# Altium PCB Video.PcbDoc
Units mm, origin at the board's own origin, x right, y up, seen from the top; angles counter-clockwise.
Board outline 44.13 x 23.11 mm, 2 copper layers (Top Layer, Bottom Layer); 36 components, 24 nets, 82 pads, 0 vias.
Unrouted connection lines stored in the file: 51.
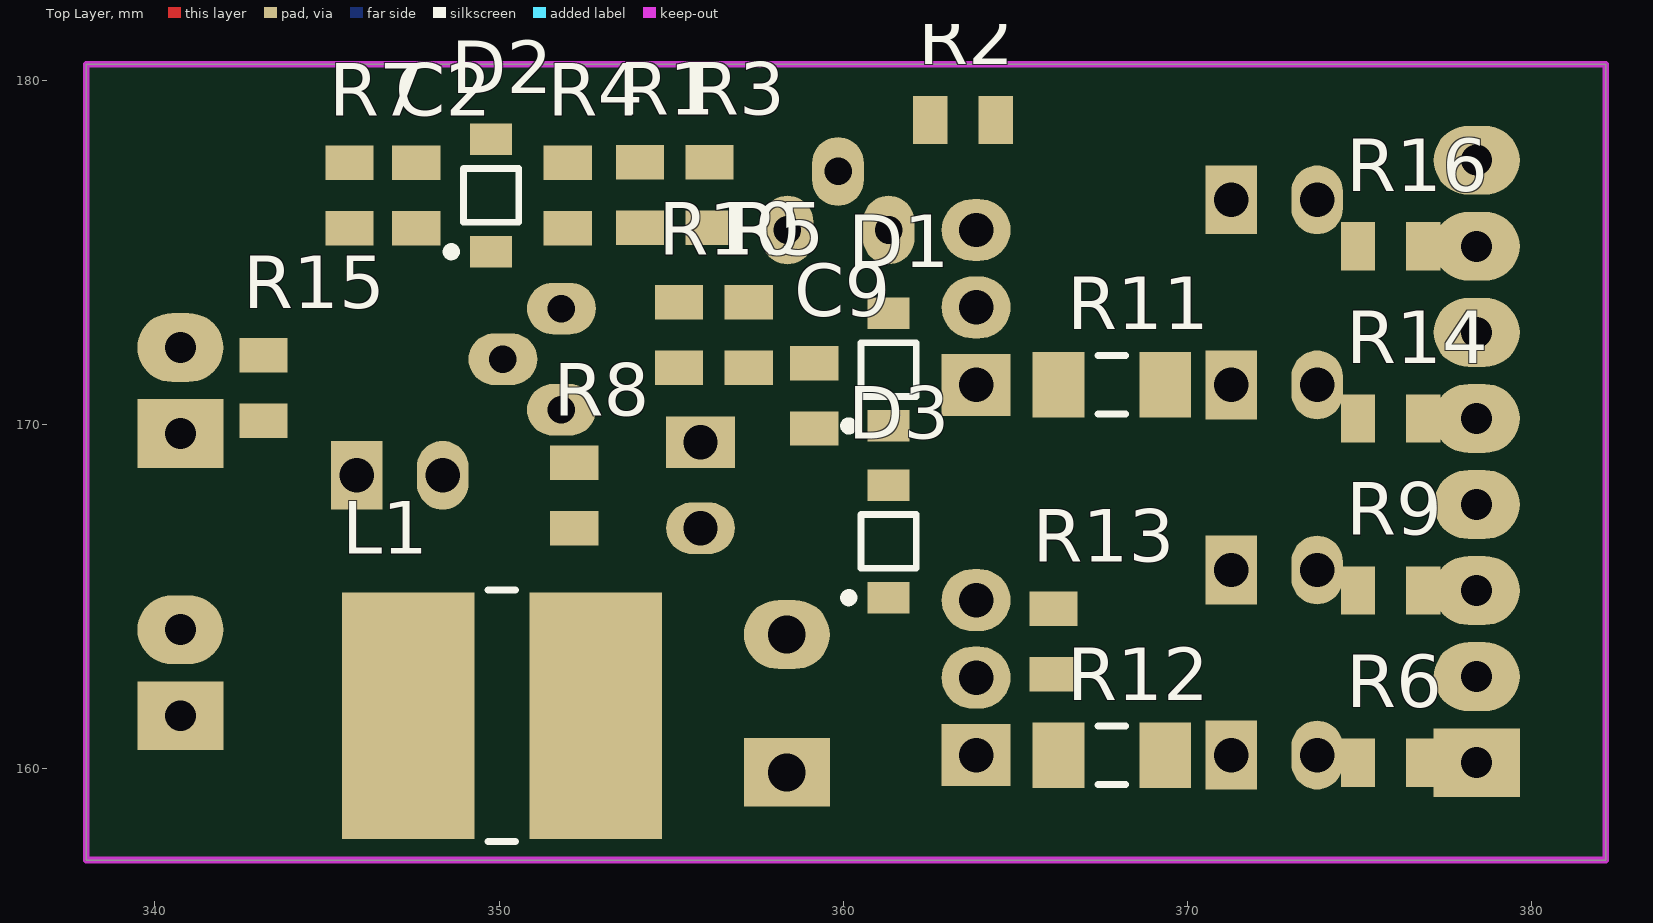
[diagram p0: Top Layer view]
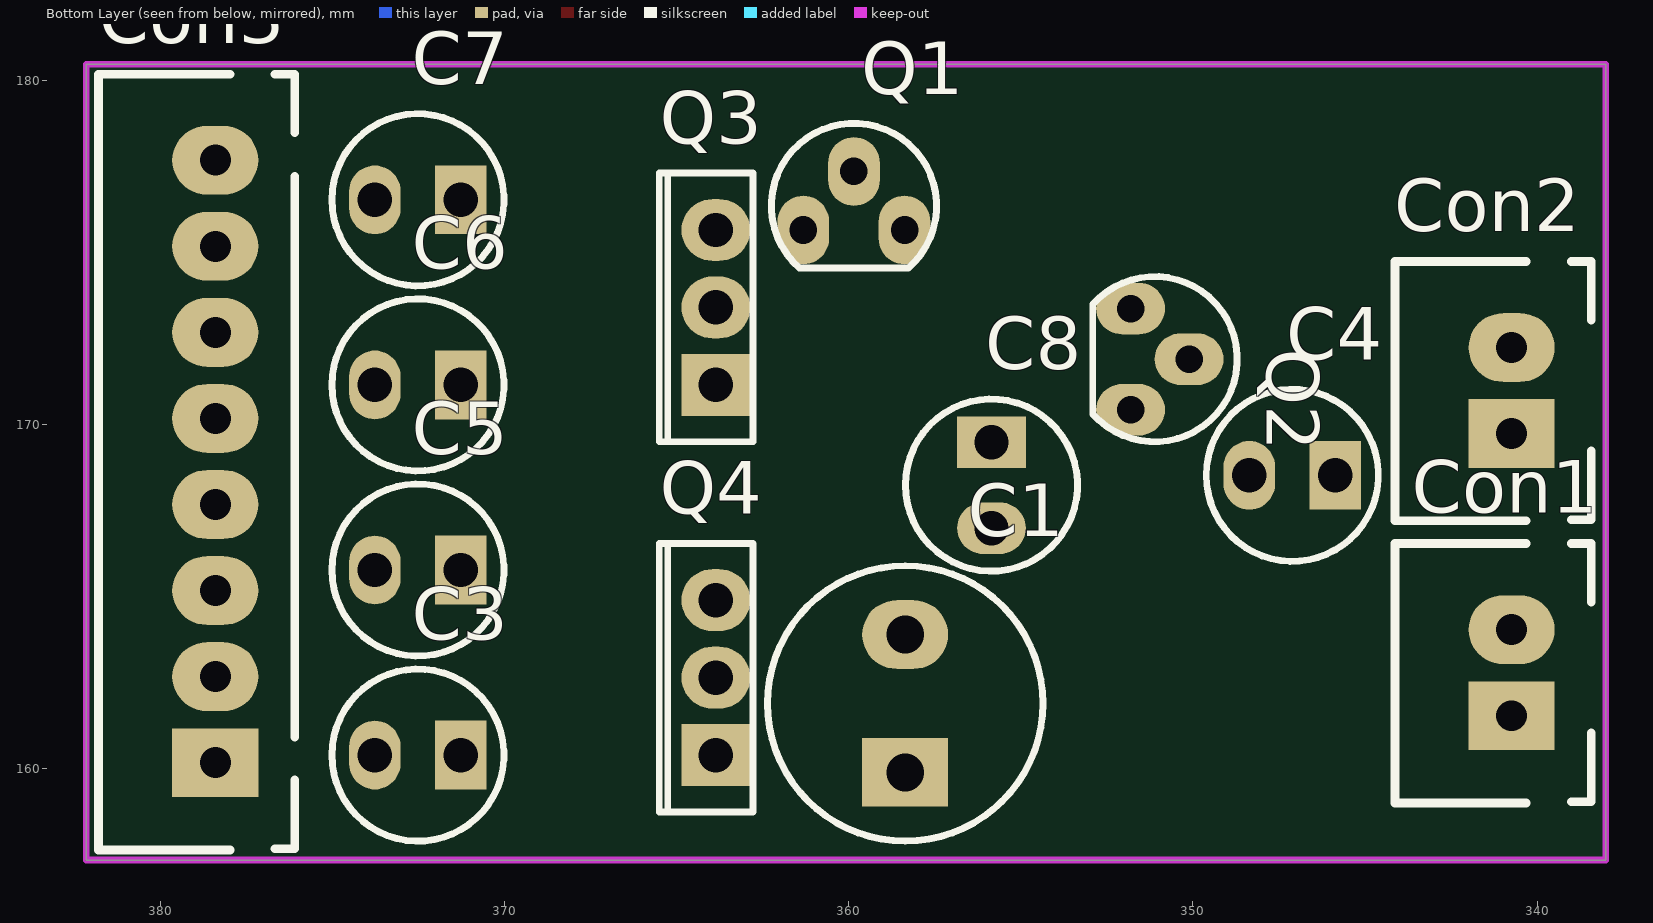
[diagram p1: Bottom Layer view, seen from below]

## Layer stack, top to bottom
Top Solder: solder mask 0.0102, Solder Resist, Dk 3.5
Top Layer: signal copper 0.0356
Dielectric 1: dielectric 0.32, FR-4, Dk 4.8
Bottom Layer: signal copper 0.0356
Bottom Solder: solder mask 0.0102, Solder Resist, Dk 3.5

## Board outline
338.009,157.353 382.143,157.353 382.143,180.467 338.009,180.467

## Design rules (kind name [scope] priority, off if disabled: settings)
Clearance [All] p1: gap=0.254 ignorepadtopadclearanceinfootprint=FALSE
PolygonConnect [All] p1: connectstyle=Relief reliefconductorwidth=0.254 reliefentries=4 polygonreliefangle="90 Angle" airgapwidth=0.254
RoutingVias [All] p1: holewidth=0.711 width=1.27 viastyle="Through Hole" minholewidth=0.711 minwidth=1.27 maxholewidth=0.711 maxwidth=1.27
SolderMaskExpansion [All] p1: expansion=0.102 istentingtop=FALSE
SupplyNets "Schematic Supply Nets" [InNet('GND')] p1: voltage=0.000
Width [All] p1: maxlimit=0.254 minlimit=0.254 preferedwidth=0.254
30 further rules are at their usual default settings.

## Components (designator, comment, footprint, x,y, rotation, side; value= is the part's Value field where it differs from the comment)
C1 "Cap Pol1" "CAP Elect 8X4" 358.356,161.901 r270 bottom value=330uF
C2 "Cap" H0805 347.591,176.657 r270 top value=10uF
C3 "Cap Pol1" "CAP Elect 5X2.5" 372.511,160.401 r180 bottom value=100uF
C4 "Cap Pol1" "CAP Elect 5X2.5" 347.111,168.529 r180 bottom value=100uF
C5 "Cap Pol1" "CAP Elect 5X2.5" 372.511,165.777 r180 bottom value=100uF
C6 "Cap Pol1" "CAP Elect 5X2.5" 372.511,171.154 r180 bottom value=100uF
C7 "Cap Pol1" "CAP Elect 5X2.5" 372.511,176.53 r180 bottom value=100uF
C8 "Cap Pol1" "CAP Elect 5X2.5" 355.85,168.243 r90 bottom value=100uF
C9 "Cap" H0805 359.156,170.838 r90 top value=10uF
Con1 "XH-2A" XH-2A 340.741,161.544 r90 bottom
Con2 "XH-2A" XH-2A 340.741,169.738 r90 bottom
Con3 "XH-8A" XH-8A 378.396,160.18 r90 bottom
D1 "MMSD4148T1" ONSC-SOD-123-2-425-04_V 361.315,171.598 r90 top
D2 "MMSD4148T1" ONSC-SOD-123-2-425-04_V 349.769,176.657 r90 top
D3 "MMSD4148T1" ONSC-SOD-123-2-425-04_V 361.315,166.608 r90 top
L1 "Inductor" INDP7870X53N 350.081,161.544 r180 top value=10uH
Q1 "BC557B" SOT54 359.845,176.354 r270 bottom
Q2 "BC547B" SOT54 351.11,171.901 r0 bottom
Q3 "BD139" TO-126 363.855,171.154 r90 bottom
Q4 "BD140" TO-126 363.855,160.401 r90 bottom
R1 "Res2" H0805 354.094,176.672 r270 top value=2.2K
R2 "Res2" H0805 363.474,178.847 r0 top value=220
R3 "Res2" H0805 356.108,176.672 r270 top value=100
R4 "Res2" H0805 351.994,176.657 r90 top value=10K
R5 "Res2" H0805 357.251,172.604 r270 top value=150
R6 "Res2" H0805 375.898,160.18 r180 top value=75
R7 "Res2" H0805 345.653,176.657 r90 top value=1K
R8 "Res2" H0805 352.181,167.943 r90 top value=100
R9 "Res2" H0805 375.898,165.18 r180 top value=75
R10 "Res2" H0805 355.227,172.604 r90 top value=47
R11 "Res2" H1206 367.8,171.154 r180 top value=10
R12 "Res2" H1206 367.8,160.401 r180 top value=10
R13 "Res2" H0805 366.1,163.703 r90 top value=470
R14 "Res2" H0805 375.898,170.18 r180 top value=75
R15 "Res2" H0805 343.154,171.069 r270 top value=75
R16 "Res2" H0805 375.898,175.18 r180 top value=75

## Footprints (in the part's own frame and the unit in brackets; to place one, negate y for a bottom-side part, rotate by r counter-clockwise, add the part's x,y. Pads: shape width x height; smd on the part's side, far side on the other; paste and mask are expansions set on the pad)
"CAP Elect 5X2.5" [mm] "CAP Elect 5X2.5"
  rect 1.5x2 hole 1: 1(1.25,0)
  oval 1.5x2 hole 1: 2(-1.25,0)
  silkscreen extent -2.5,-2.5 2.5,2.5, body extent -2.5,-2.5 2.5,2.5, height 7
"CAP Elect 8X4" [mm] "CAP Elect 8X4"
  rect 2x2.5 hole 1.1: 1(2,0)
  oval 2x2.5 hole 1.1: 2(-2,0)
  silkscreen extent -4,-4 4,4, body extent -4,-4 4,4, height 12.6
H0805 [mm] "Chip Capacitor, Body 2.0x1.3mm, IPC High Density"
  rect 1x1.4 smd: 1(-0.95,0) 2(0.95,0)
  body extent -1.1,-0.72 1.1,0.72, height 1.4
H1206 [mm] "Chip Capacitor, Body 3.2x1.6mm, IPC Low Density"
  rect 1.5x1.9 smd: 1(-1.55,0) 2(1.55,0)
  silkscreen extent -0.4,-0.85 0.4,0.85, body extent -1.7,-0.9 1.7,0.9, height 1.35
INDP7870X53N [mm] "Precision Wire Wound Inductor, 2-Leads, Body 7.80x7.00mm, IPC Medium Density"
  rect 3.85x7.15 smd: 1(-2.725,0) 2(2.725,0)
  silkscreen extent -0.4,-3.65 0.4,3.65, body extent -4.05,-3.65 4.05,3.65, height 5.3
ONSC-SOD-123-2-425-04_V [mm] "SOD, 2-Leads, Body 2.69x1.6mm"
  rect 0.91x1.22 smd: 1(-1.635,0) 2(1.635,0)
  silkscreen extent -1.76,-0.8 0.78,1.28, body extent -1.35,-0.8 1.35,0.8, height 1.35
SOT54 [mm] "TO, Flat Index; 3 In-Line, Axial Leads; Body Dia. 4.6mm; Leads 0.48 x 0.45 mm (max)"
  oval 2x1.5 hole 0.8: 1(0.7,1.47) 2(-1,0) 3(0.7,-1.47)
  silkscreen extent -2.4,-2.4 1.8,2.4
TO-126 [mm]
  rect 1.8x2 hole 1: 1(0,0)
  oval 1.8x2 hole 1: 2(2.25,0) 3(4.5,0)
  silkscreen extent -1.65,-1.07 6.15,1.65
XH-2A [mm] "2.5mm"
  rect 2x2.5 hole 0.9: 1(0,0)
  oval 2x2.5 hole 0.9: 2(2.5,0)
  silkscreen extent -2.53,-2.31 5,3.39, body extent -2.53,-2.31 5,3.39, height 6.8
XH-8A [mm] "2.5mm"
  rect 2x2.5 hole 0.9: 1(0,0)
  oval 2x2.5 hole 0.9: 2(2.5,0) 3(5,0) 4(7.5,0) 5(10,0) 6(12.5,0) 7(15,0) 8(17.5,0)
  silkscreen extent -2.53,-2.31 20,3.39, body extent -2.54,-2.31 20,3.39, height 6.8

## Part data
C1 C3 C4 C5 C6 C7 C8: "Polarized Capacitor (Radial)"
C2 C9: "Capacitor"
Con1 Con2 Con3: "2.5mm"
D1 D2 D3: "Switching Diode, 2-Pin SOD-123, Tape and Reel", Manufacturer="On Semiconductor", Supplier Part Number 1=MMSD4148T1OSCT-ND, ComponentLink1Description="Manufacturer URL", ComponentLink1URL=http://www.onsemi.com/, ComponentLink2Description=Datasheet, ComponentLink2URL=http://www.onsemi.com/pub_link/Collateral/MMSD4148T1-D.PDF, ComponentLink3Description="Package Specification", ComponentLink3URL=http://www.onsemi.com/pub_link/Collateral/425-04.PDF, Configuration=Single, DatasheetVersion="Rev. 11", IF Max (A)=0.2, Mounting Technology="Surface Mount", PackageDescription="2-Pin SOD, Body 1.6 x 2.69 mm", PackageReference=SOD-123-2-425-04, PackageVersion="Rev. G, 10/2009", Packing="Tape and Reel", PartNumber=MMSD4148T1, RoHS=FALSE, Supplier 1=Digi-Key, trr Max (ns)=4
Q1: "PNP General-purpose Transistor", Code_JEDEC=TO-92, Code_JEITA=SC-43, ComponentLink1Description="Manufacturer Link", ComponentLink1URL=http://www.semiconductors.philips.com/, ComponentLink2Description=Datasheet, ComponentLink2URL=http://www.semiconductors.philips.com/acrobat/datasheets/BC556_557_3.pdf, DatasheetVersion=15-Apr-1999, LatestRevisionDate=12-Dec-2006, LatestRevisionNote="Footprint pad sequence fixed.", PackageDescription="Plastic Single-Ended Leaded (through hole) package; 3 Leads (TO-92)", PackageReference=SOT54, PackageVersion=Feb-1997, Published=17-Sep-2003, Publisher="Altium Limited"
Q2: "NPN General-purpose Transistor", Code_JEDEC=TO-92, Code_JEITA=SC-43, ComponentLink1Description="Manufacturer Link", ComponentLink1URL=http://www.semiconductors.philips.com/, ComponentLink2Description=Datasheet, ComponentLink2URL=http://www.semiconductors.philips.com/acrobat/datasheets/BC546_547_3.pdf, DatasheetVersion=15-Apr-1999, LatestRevisionDate=12-Dec-2006, LatestRevisionNote="Footprint pad sequence fixed.", PackageDescription="Plastic Single-Ended Leaded (through hole) package; 3 Leads (TO-92)", PackageReference=SOT54, PackageVersion=Feb-1997, Published=17-Sep-2003, Publisher="Altium Limited"
Q3: "NPN SILICON TRANSISTORS"
Q4: "PNP SILICON TRANSISTORS"
R1 R2 R3 R4 R5 R6 R7 R8 R9 R10 R11 R12 R13 R14 R15 R16: "Resistor", LatestRevisionDate=17-Jul-2002, LatestRevisionNote="Re-released for DXP Platform.", PackageDescription="Axial Device, Thru-Hole; 2 Leads; 0.4 in Pin Spacing", PackageReference=AXIAL-0.4, Published=8-Jun-2000, Publisher="Altium Limited"
L1: Code_IEC=1005, Code_JEITA=0402, LatestRevisionDate=29-May-2009, LatestRevisionNote="IPC-7351 Footprint Added.", PackageDescription="Chip Inductor", PackageReference=0402-A, Published=8-Jun-2000, Publisher="Altium Limited"

## Nets (pads, with @x,y where several pads share a name; then routed paths per layer and width w, separated by ;. In a path a pad name is that pad's centre, name@x,y a point inside that pad or via, vN(x,y) a via of type N, cw(c..) or ccw(c..) an arc to the next point about the centre after c; other vN are vias at no path point)
GND: C1.2 C2.2 C8.2 Con1.2 Con2.2 Con3.2 Con3.4 Con3.6 Con3.8 Q4.2 R7.1 R8.1 R13.1 R15.1
NetC1_1: C1.1 L1.1 Q3.2 R1.2 R2.2 R3.2
NetC2_1: C2.1 D2.2 R1.1 R4.2 R7.2
NetC3_1: C3.1 C5.1 C6.1 C7.1 R5.2 R11.1 R12.1
NetC3_2: C3.2 R6.2
NetC4_1: C4.1 Con2.1 R15.2
NetC4_2: C4.2 D2.1 Q2.2 R4.1
NetC5_2: C5.2 R9.2
NetC6_2: C6.2 R14.2
NetC7_2: C7.2 R16.2
NetC8_1: C8.1 R10.1
NetC9_1: C9.1 D3.1 Q4.3 R13.2
NetC9_2: C9.2 D1.2 Q1.3 Q3.3
NetCon1_1: Con1.1 L1.2
NetCon3_1: Con3.1 R6.1
NetCon3_3: Con3.3 R9.1
NetCon3_5: Con3.5 R14.1
NetCon3_7: Con3.7 R16.1
NetD1_1: D1.1 D3.2
NetQ1_1: Q1.1 R3.1
NetQ1_2: Q1.2 Q2.3 R2.1
NetQ2_1: Q2.1 R5.1 R8.2 R10.2
NetQ3_1: Q3.1 R11.2
NetQ4_1: Q4.1 R12.2

## Keep-outs
Keep-Out Layer:
  the board outline again, w0.2